# EAGLE board minimumSystem (EAGLE 9.6.1)
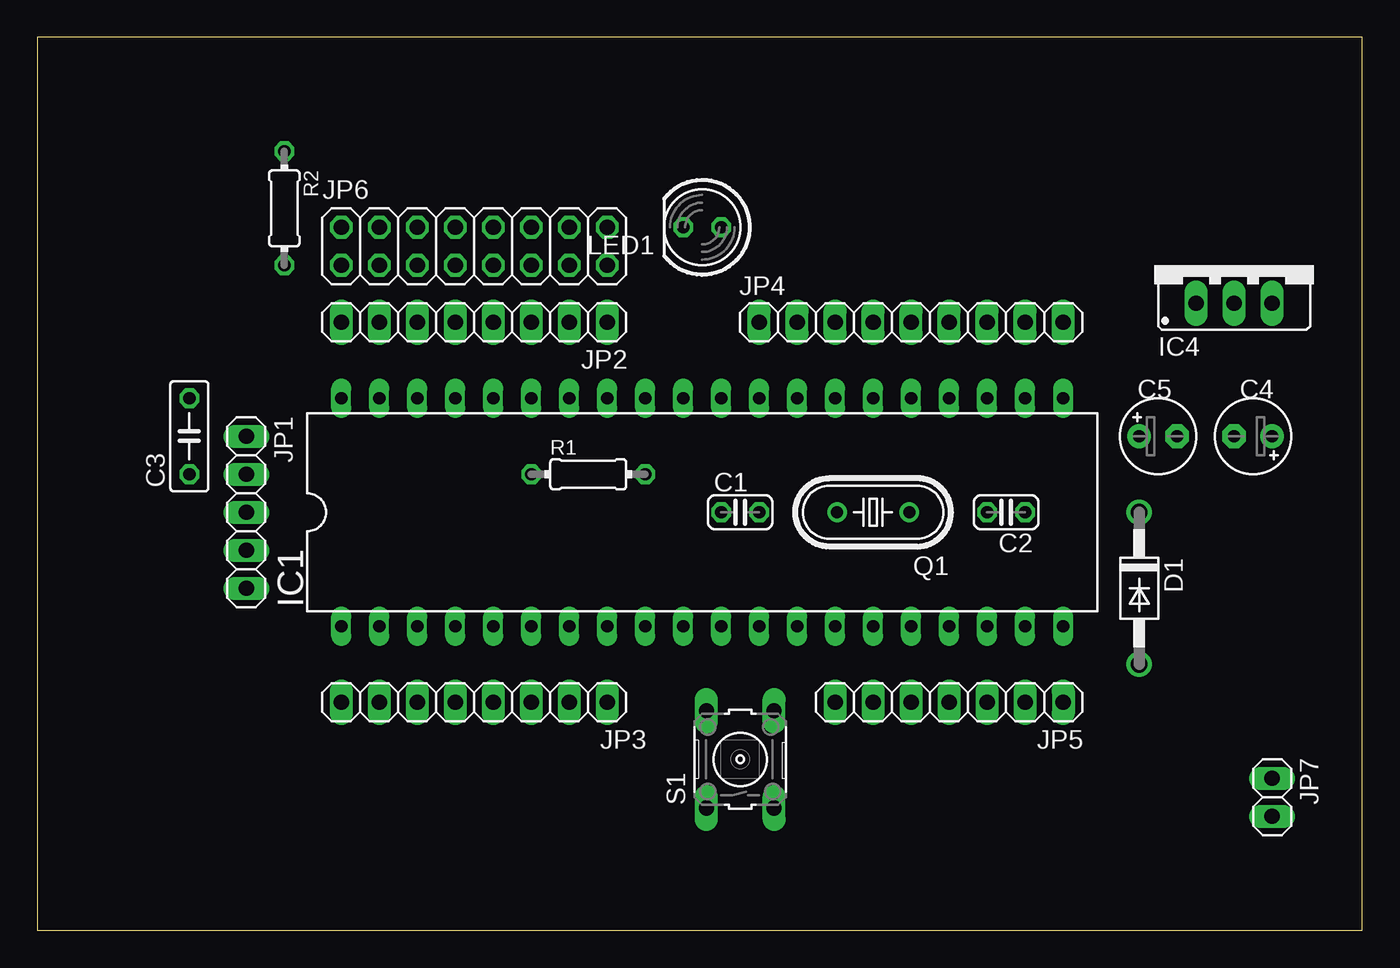
[diagram p0: board, top side]
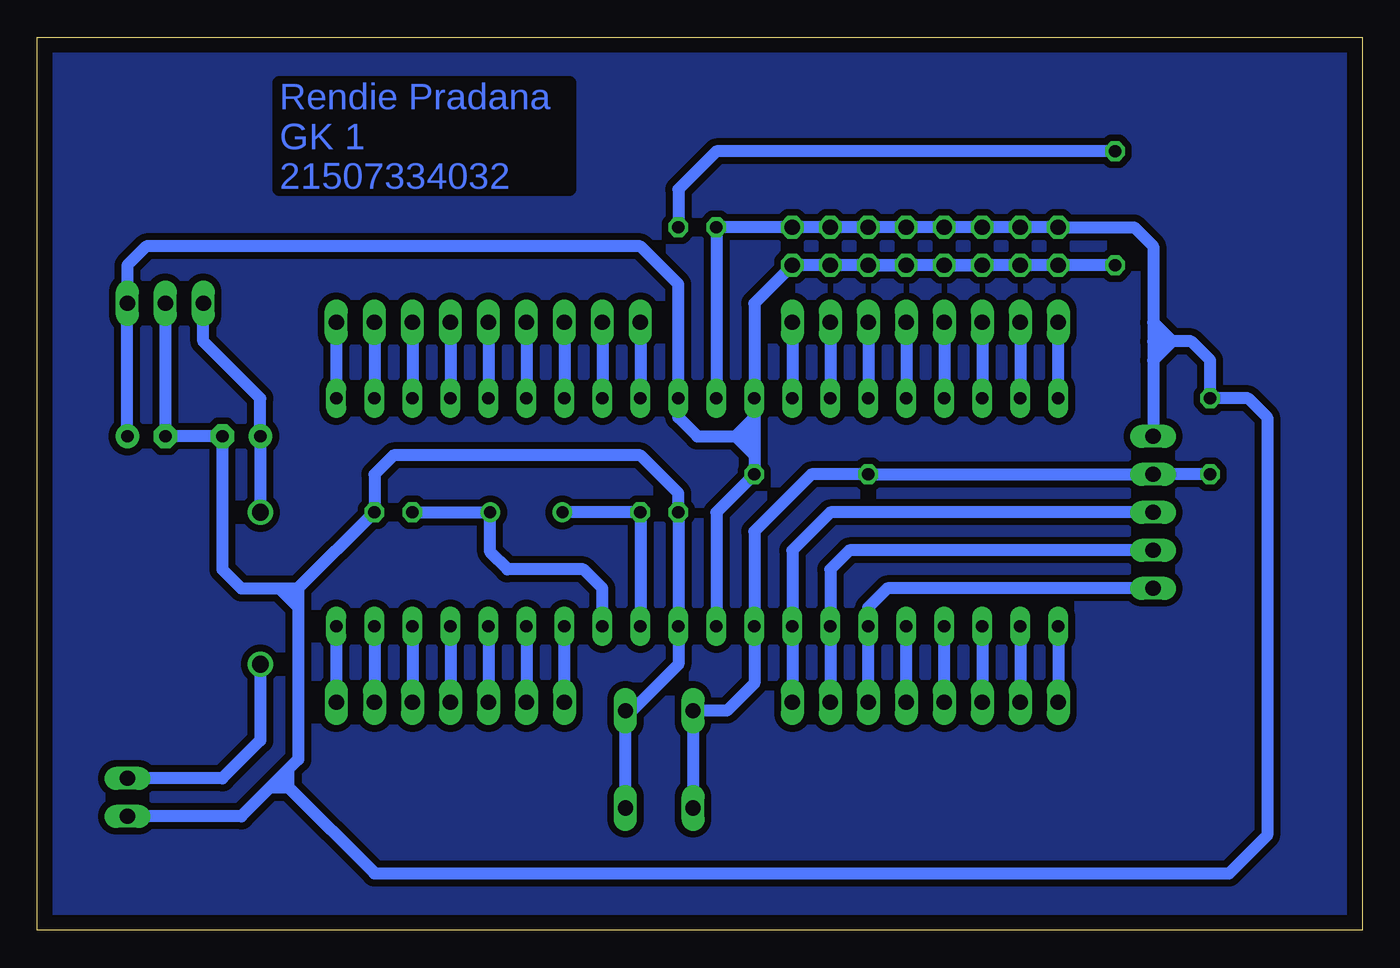
[diagram p1: board, bottom side, seen from below]

Size 88.57 x 59.68 mm. Coordinates in mm from the lower left corner, seen from the top.
Outline: 0,0 88.57,0 88.57,59.68 0,59.68 0,0
Copper layers (1*16): Top 0.035mm / dielectric 1.5mm / Bottom 0.035mm
Design rules "default *": minimum track width 6mil, minimum drill 0.35mm, track to track 18mil, track to pad 18mil, pad to pad 18mil, via to via 18mil, smd to smd 18mil, copper to edge 40mil, drill to drill 6mil, minimum pad ring 10mil, minimum via ring 8mil, stop-mask expansion 4mil, vias tented up to drill 0mil, thermal gap 10mil

## Footprints (pad centres in the part's own frame; a part is rotated, then mirrored left to right if it is on the bottom)
C025-024X044 = drill 0.813 octagon: 1 -1.27,0; 2 1.27,0
C050-025X075 = drill 0.813 octagon: 1 -2.54,0; 2 2.54,0
E2,5-5 = drill 0.813 pad 1.6: + -1.27,0 | drill 0.813 pad 1.6 octagon: - 1.27,0
DO41-10 = drill 1.118: A 5.08,0; C -5.08,0
DIL40 = drill 0.813 long: 1 -24.13,-7.62; 2 -21.59,-7.62; 3 -19.05,-7.62; 4 -16.51,-7.62; 5 -13.97,-7.62; 6 -11.43,-7.62; 7 -8.89,-7.62; 8 -6.35,-7.62; 9 -3.81,-7.62; 10 -1.27,-7.62; 11 1.27,-7.62; 12 3.81,-7.62; 13 6.35,-7.62; 14 8.89,-7.62; 15 11.43,-7.62; 16 13.97,-7.62; 17 16.51,-7.62; 18 19.05,-7.62; 19 21.59,-7.62; 20 24.13,-7.62; 21 24.13,7.62; 22 21.59,7.62; 23 19.05,7.62; 24 16.51,7.62; 25 13.97,7.62; 26 11.43,7.62; 27 8.89,7.62; 28 6.35,7.62; 29 3.81,7.62; 30 1.27,7.62; 31 -1.27,7.62; 32 -3.81,7.62; 33 -6.35,7.62; 34 -8.89,7.62; 35 -11.43,7.62; 36 -13.97,7.62; 37 -16.51,7.62; 38 -19.05,7.62; 39 -21.59,7.62; 40 -24.13,7.62
78XXS = drill 1.016 long: GND 0,-2.54; IN -2.54,-2.54; OUT 2.54,-2.54
1X05 = drill 1.016 long: 1 -5.08,0; 2 -2.54,0; 3 0,0; 4 2.54,0; 5 5.08,0
1X08 = drill 1.016 long: 1 -8.89,0; 2 -6.35,0; 3 -3.81,0; 4 -1.27,0; 5 1.27,0; 6 3.81,0; 7 6.35,0; 8 8.89,0
1X09 = drill 1.016 long: 1 -10.16,0; 2 -7.62,0; 3 -5.08,0; 4 -2.54,0; 5 0,0; 6 2.54,0; 7 5.08,0; 8 7.62,0; 9 10.16,0
1X07 = drill 1.016 long: 1 -7.62,0; 2 -5.08,0; 3 -2.54,0; 4 0,0; 5 2.54,0; 6 5.08,0; 7 7.62,0
2X08 = drill 1.016 octagon: 1 -8.89,-1.27; 2 -8.89,1.27; 3 -6.35,-1.27; 4 -6.35,1.27; 5 -3.81,-1.27; 6 -3.81,1.27; 7 -1.27,-1.27; 8 -1.27,1.27; 9 1.27,-1.27; 10 1.27,1.27; 11 3.81,-1.27; 12 3.81,1.27; 13 6.35,-1.27; 14 6.35,1.27; 15 8.89,-1.27; 16 8.89,1.27
1X02 = drill 1.016 long: 1 -1.27,0; 2 1.27,0
LED5MM = drill 0.813 octagon: A -1.27,0; K 1.27,0
HC49U-V = drill 0.813: 1 -2.413,0; 2 2.413,0
0204/7 = drill 0.813 octagon: 1 -3.81,0; 2 3.81,0
B3F-10XX = drill 1.016 long: 1 -3.251,2.261; 2 3.251,2.261; 3 -3.251,-2.261; 4 3.251,-2.261

## Placement (x,y rotation side)
C1  [C025-024X044]  46.99,27.94 0 top
C2  [C025-024X044]  64.77,27.94 180 top
C3  [C050-025X075]  10.16,33.02 90 top
C4  [E2,5-5]  81.28,33.02 180 top
C5  [E2,5-5]  74.93,33.02 0 top
D1  1N4004  [DO41-10]  73.66,22.86 270 top
IC1  MEGA16-P  [DIL40]  44.45,27.94 0 top
IC4  [78XXS]  80.01,44.45 0 top
JP1  [1X05]  13.97,27.94 270 top
JP2  [1X08]  29.21,40.64 180 top
JP3  [1X08]  29.21,15.24 180 top
JP4  [1X09]  58.42,40.64 0 top
JP5  [1X07]  60.96,15.24 180 top
JP6  [2X08]  29.21,45.72 0 top
JP7  [1X02]  82.55,8.89 270 top
LED1  [LED5MM]  44.45,46.99 180 top
Q1  [HC49U-V]  55.88,27.94 180 top
R1  [0204/7]  36.83,30.48 0 top
R2  [0204/7]  16.51,48.26 270 top
S1  [B3F-10XX]  46.99,11.43 90 top

## Library data of the parts
C1 C2 C4 C5 R1 R2 = rcl
C3 = resistor
D1 = diode
IC1 = atmel; MPN: ATMEGA16-16PU; OC_FARNELL: 9171142; OC_NEWARK: 01M6885
IC4 = v-reg
JP1-JP7 = pinhead
LED1 = led
Q1 = crystal; OC_FARNELL: 1666969; OC_NEWARK: unknown
S1 = switch-omron; MPN: B3F-1000; OC_FARNELL: 176432; OC_NEWARK: 36M3542

## Nets
+5V: C4.+ IC1.10 IC1.30 IC1.32 IC4.OUT JP6.1 JP6.3 JP6.5 JP6.7 JP6.9 JP6.11 JP6.13 JP6.15 R1.2 R2.2
+12V: D1.A JP7.1
C0: IC1.22 JP4.8
C1: IC1.23 JP4.7
C2: IC1.24 JP4.6
C3: IC1.25 JP4.5
D7: IC1.14 JP5.7
GND: C1.1 C2.1 C3.2 C4.- C5.- IC1.11 IC1.31 IC4.GND JP1.1 JP6.2 JP6.4 JP6.6 JP6.8 JP6.10 JP6.12 JP6.14 JP6.16 JP7.2 LED1.K S1.3 S1.4
N$1: IC1.33 JP2.1
N$2: IC1.34 JP2.2
N$3: IC1.35 JP2.3
N$4: IC1.36 JP2.4
N$5: IC1.37 JP2.5
N$6: IC1.38 JP2.6
N$7: IC1.39 JP2.7
N$8: IC1.40 JP2.8
N$11: IC1.29 JP4.1
N$12: IC1.28 JP4.2
N$13: IC1.27 JP4.3
N$14: IC1.5 JP3.4
N$15: IC1.20 JP5.1
N$16: IC1.19 JP5.2
N$19: IC1.26 JP4.4
N$20: IC1.6 JP1.5 JP3.3
N$21: IC1.4 JP3.5
N$22: IC1.3 JP3.6
N$23: IC1.2 JP3.7
N$24: IC1.1 JP3.8
N$25: C5.+ D1.C IC4.IN
N$30: IC1.15 JP5.6
N$31: IC1.16 JP5.5
N$32: IC1.17 JP5.4
N$33: C3.1 IC1.9 JP1.2 R1.1 S1.1 S1.2
N$34: IC1.18 JP5.3
N$35: C1.2 IC1.12 Q1.2
N$36: C2.2 IC1.13 Q1.1
N$37: LED1.A R2.1
N$46: IC1.8 JP1.3 JP3.1
N$47: IC1.7 JP1.4 JP3.2
RS: IC1.21 JP4.9

## Tracks (layer width: path | path; a pad name or v marks a point on that pad's centre or on a via)
+5V
  Bottom 0.813: JP6.5 JP6.9 | JP6.9 JP6.13 | 40.64,34.29 IC1.32 40.64,41.91 JP6.15 JP6.13 | 40.64,34.29 40.64,33.02 | 40.64,33.02 40.64,31.75 | 40.64,31.75 R1.2 43.18,27.94 IC1.10 | R2.2 JP6.1 JP6.3 JP6.5 | C4.+ IC4.OUT 82.55,44.45 81.28,45.72 48.26,45.72 45.72,43.18 IC1.30 45.72,34.29 44.45,33.02 41.91,33.02 | JP6.9 JP6.7 JP6.5 | JP6.13 JP6.11 JP6.9 | 40.64,33.02 41.91,33.02 | 41.91,33.02 40.64,31.75 | 41.91,33.02 40.64,34.29
+12V
  Bottom 0.813: D1.A 73.66,12.7 76.2,10.16 JP7.1
C0
  Bottom 0.813: JP4.8 IC1.22
C1
  Bottom 0.813: JP4.7 IC1.23
C2
  Bottom 0.813: JP4.6 IC1.24
C3
  Bottom 0.813: JP4.5 IC1.25
D7
  Bottom 0.813: JP5.7 IC1.14
GND
  Bottom 0.813: IC1.31 LED1.K JP6.16 JP6.14 JP6.12 JP6.10 JP6.8 JP6.6 JP6.4 JP6.2 15.24,46.99 13.97,45.72 13.97,40.64 | 13.97,40.64 13.97,39.37 | 13.97,39.37 13.97,38.1 | 13.97,38.1 JP1.1 | IC4.GND C4.- C5.- 76.2,24.13 74.93,22.86 72.39,22.86 | 71.12,22.86 C2.1 66.04,30.48 64.77,31.75 48.26,31.75 45.72,29.21 C1.1 IC1.11 45.72,17.78 48.82,14.68 S1.4 S1.3 | 71.75,10.79 71.12,11.43 71.12,21.59 | 71.75,10.79 72.39,10.16 | 72.39,10.16 73.02,9.52 | 73.02,9.52 74.93,7.62 JP7.2 | 71.12,22.86 71.12,21.59 | 72.39,22.86 71.12,22.86 | 72.39,22.86 71.12,21.59 | 12.7,39.37 11.43,39.37 10.16,38.1 C3.2 7.62,35.56 6.35,34.29 6.35,6.35 8.89,3.81 66.04,3.81 71.75,9.52 | 13.97,39.37 12.7,39.37 | 12.7,39.37 13.97,38.1 | 12.7,39.37 13.97,40.64 | 72.39,10.16 71.75,9.52 | 71.75,9.52 73.02,9.52 | 71.75,9.52 71.75,10.79
GROUND
  pour Bottom (isolate 0.406): 0,59.69 88.9,59.69 88.9,0 0,0
N$1
  Bottom 0.813: JP2.1 IC1.33
N$2
  Bottom 0.813: JP2.2 IC1.34
N$3
  Bottom 0.813: JP2.3 IC1.35
N$4
  Bottom 0.813: JP2.4 IC1.36
N$5
  Bottom 0.813: JP2.5 IC1.37
N$6
  Bottom 0.813: JP2.6 IC1.38
N$7
  Bottom 0.813: JP2.7 IC1.39
N$8
  Bottom 0.813: IC1.40 JP2.8
N$11
  Bottom 0.813: JP4.1 IC1.29
N$12
  Bottom 0.813: JP4.2 IC1.28
N$13
  Bottom 0.813: JP4.3 IC1.27
N$14
  Bottom 0.813: JP3.4 IC1.5
N$15
  Bottom 0.813: IC1.20 JP5.1
N$16
  Bottom 0.813: IC1.19 JP5.2
N$19
  Bottom 0.813: JP4.4 IC1.26
N$20
  Bottom 0.813: JP3.3 IC1.6 33.02,21.59 31.75,22.86 JP1.5
N$21
  Bottom 0.813: JP3.5 IC1.4
N$22
  Bottom 0.813: IC1.3 JP3.6
N$23
  Bottom 0.813: IC1.2 JP3.7
N$24
  Bottom 0.813: IC1.1 JP3.8
N$25
  Bottom 0.813: IC4.IN 77.47,39.37 73.66,35.56 C5.+ D1.C
N$30
  Bottom 0.813: IC1.15 JP5.6
N$31
  Bottom 0.813: IC1.16 JP5.5
N$32
  Bottom 0.813: IC1.17 JP5.4
N$33
  Bottom 0.813: C3.1 JP1.2 R1.1 36.83,30.48 40.64,26.67 IC1.9 40.64,16.51 42.47,14.68 S1.2 S1.1
N$34
  Bottom 0.813: IC1.18 JP5.3
N$35
  Bottom 0.813: IC1.12 C1.2 Q1.2
N$36
  Bottom 0.813: C2.2 Q1.1 58.29,25.27 57.15,24.13 52.07,24.13 50.8,22.86 IC1.13
N$37
  Bottom 0.813: R2.1 43.18,52.07 45.72,49.53 LED1.A
N$46
  Bottom 0.813: JP3.1 IC1.8 38.1,25.4 35.56,27.94 JP1.3
N$47
  Bottom 0.813: JP3.2 IC1.7 35.56,24.13 34.29,25.4 JP1.4
RS
  Bottom 0.813: JP4.9 IC1.21

## Text on the board
Bottom: Rendie Pradana / GK 1 / 21507334032